# EAGLE board uart-usb (EAGLE 6.1)
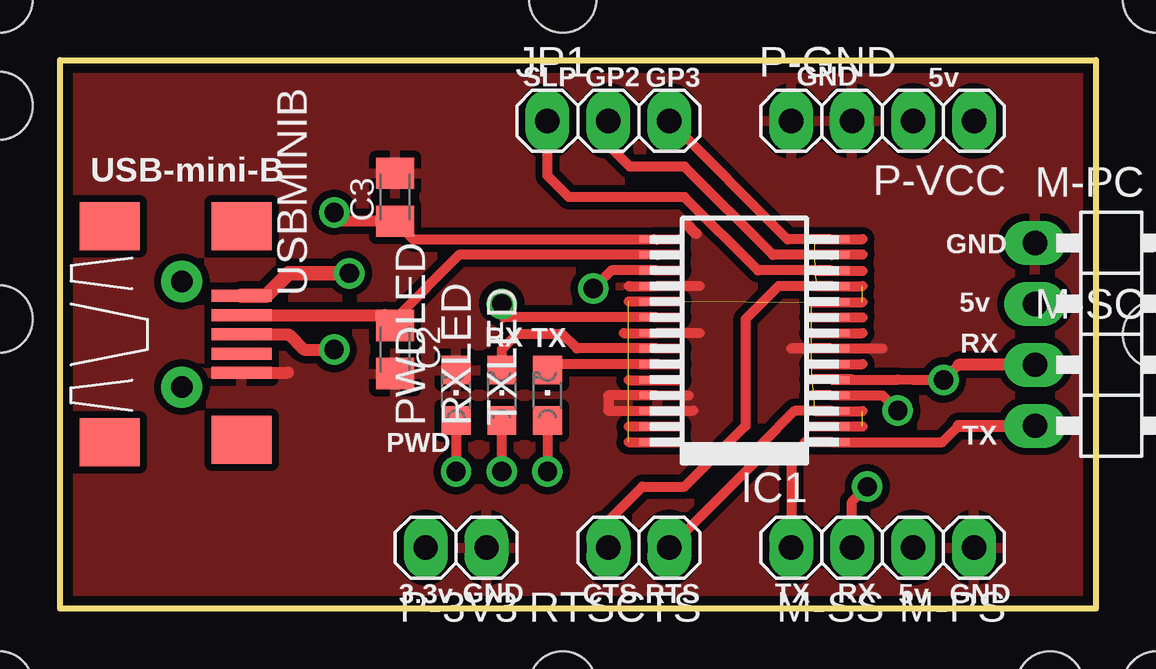
[diagram p0: board, top side]
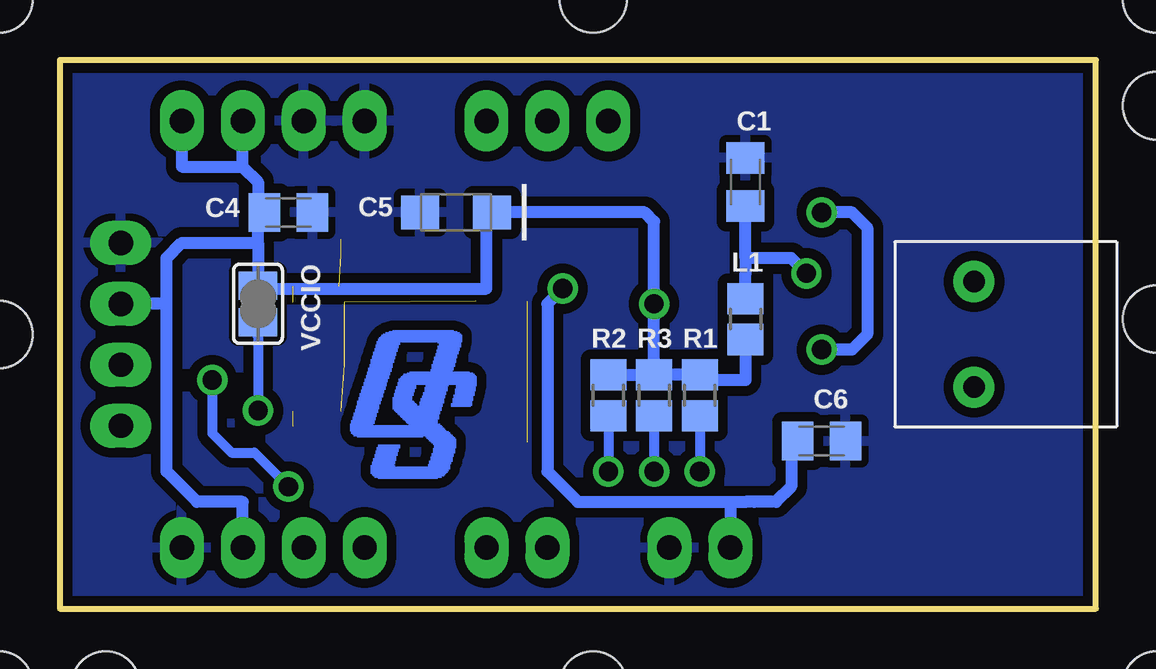
[diagram p1: board, bottom side, seen from below]

Size 43.18 x 22.86 mm. Coordinates in mm from the lower left corner, seen from the top.
Outline: 0,0 0,22.86 43.18,22.86 43.18,0 0,0
Copper layers (1*16): Top 0.035mm / dielectric 1.5mm / Bottom 0.035mm
Design rules: minimum track width 12mil, minimum drill 26mil, track to track 12mil, track to pad 12mil, pad to pad 12mil, via to via 12mil, smd to smd 8mil, copper to edge 16mil, drill to drill 16mil, minimum pad ring 16mil, minimum via ring 8mil, stop-mask expansion 4mil, vias tented up to drill 0mil, thermal gap 12mil
Net classes: 0 POWER: width 0.356 mm; 1 GPIO: width 0.356 mm; 2 NORMAL: width 0.356 mm
Holes 2.8 mm at -2.54,25.4 -2.54,-3.18 45.72,-3.18 45.72,25.4 20.96,25.4 20.96,-3.18 45.72,11.43 -2.54,12.06 -2.54,20.95 41.28,-3.18

## Footprints (pad centres in the part's own frame; a part is rotated, then mirrored left to right if it is on the bottom)
C0805K = smd 1.3 x 1.6: 1 -1,0; 2 1,0
SMC_A = smd 1.6 x 1.4: + -1.5,0; - 1.5,0
SSOP-28 = smd 0.3 x 1.5: 1 -4.225,-3.625; 2 -3.575,-3.625; 3 -2.925,-3.625; 4 -2.275,-3.625; 5 -1.625,-3.625; 6 -0.975,-3.625; 7 -0.325,-3.625; 8 0.325,-3.625; 9 0.975,-3.625; 10 1.625,-3.625; 11 2.275,-3.625; 12 2.925,-3.625; 13 3.575,-3.625; 14 4.225,-3.625; 15 4.225,3.625; 16 3.575,3.625; 17 2.925,3.625; 18 2.275,3.625; 19 1.625,3.625; 20 0.975,3.625; 21 0.325,3.625; 22 -0.325,3.625; 23 -0.975,3.625; 24 -1.625,3.625; 25 -2.275,3.625; 26 -2.925,3.625; 27 -3.575,3.625; 28 -4.225,3.625
1X03 = drill 1.016 long: 1 -2.54,0; 2 0,0; 3 2.54,0
R0805 = smd 1.3 x 1.5: 1 -0.85,0; 2 0.85,0
1X02/90 = drill 1.016 long: 1 -1.27,-3.81; 2 1.27,-3.81
1X02 = drill 1.016 long: 1 -1.27,0; 2 1.27,0
CHIPLED_0805 = smd 1.2 x 1.2: A 0,-1.05; C 0,1.05
USB-MB-S = smd 2.5 x 0.5: D+ 2.5,0; D- 2.5,0.8; GND 2.5,-1.6; ID 2.5,-0.8; VBUS 2.5,1.6 | smd 2.5 x 2: P$1 -3,-4.5; P$2 -3,4.5; P$3 2.5,-4.4; P$4 2.5,4.5 | drill 0.9: P$5 0,2.2; P$6 0,-2.2
SJ = smd 1.168 x 1.6: 1 -0.762,0; 2 0.762,0

## Placement (x,y rotation side)
C1  10nF**  [C0805K]  14.61,17.78 90 bottom
C2  47pF**  [C0805K]  13.97,10.8 270 top
C3  47pF**  [C0805K]  13.97,17.15 90 top
C4  100nF  [C0805K]  33.66,16.51 0 bottom
C5  4.7uF 20V  [SMC_A]  26.67,16.51 180 bottom
C6  100n  [C0805K]  11.43,6.98 0 bottom
DRILEGEND  [DRILEGEND]  -8.55,-4.79 0 top  (outside the outline)
IC1  FT232RL  [SSOP-28]  28.54,11.16 90 top
JP1  [1X03]  22.86,20.32 0 top
L1  0 H  [R0805]  14.61,12.06 270 bottom
M-PC  [1X02/90]  44.45,13.97 270 top
M-PS  [1X02]  36.83,2.54 180 top
M-SC  [1X02/90]  44.45,8.89 270 top
M-SS  [1X02]  31.75,2.54 180 top
P-3V3  [1X02]  16.51,2.54 180 top
P-GND  [1X02]  31.75,20.32 0 top
P-VCC  [1X02]  36.83,20.32 180 top
PWDLED  [CHIPLED_0805]  16.51,8.89 0 top
R1  270  [R0805]  16.51,8.89 270 bottom
R2  270  [R0805]  20.32,8.89 270 bottom
R3  510  [R0805]  18.42,8.89 270 bottom
RTSCTS  [1X02]  24.13,2.54 180 top
RXLED  [CHIPLED_0805]  18.42,8.89 0 top
TXLED  [CHIPLED_0805]  20.32,8.89 0 top
U$1  [SMP_OS12]  32.39,5.08 0 bottom
USBMINIB  [USB-MB-S]  5.08,11.43 0 top
VCCIO  [SJ]  34.92,12.7 270 bottom

## Library data of the parts
C1-C6 L1 R1-R3 = resistor
DRILEGEND = drilegend
IC1 = ftdi4
JP1 M-PC M-PS M-SC M-SS P-3V3 P-GND P-VCC RTSCTS = pinhead
PWDLED RXLED TXLED = led
U$1 = mlogo
USBMINIB = con-usb-3
VCCIO = jumper

## Nets
3V3OUT [GPIO]: C6.1 IC1.17 P-3V3.2
CTS [NORMAL]: IC1.11 RTSCTS.2
D+: C3.1 IC1.15 USBMINIB.D+
D-: C2.1 IC1.16 USBMINIB.D-
DCD [NORMAL]: IC1.10
DSR [NORMAL]: IC1.9
DTR [NORMAL]: IC1.2
GND: C1.2 C2.2 C3.2 C4.2 C5.- C6.2 IC1.7 IC1.18 IC1.21 IC1.25 IC1.26 M-PC.1 M-PS.1 P-3V3.1 P-GND.1 P-GND.2 PWDLED.C USBMINIB.GND
GPIO2 [GPIO]: IC1.13 JP1.2
GPIO3 [GPIO]: IC1.14 JP1.3
N$1: R3.2 RXLED.A
N$2: PWDLED.A R1.2
N$3: R2.2 TXLED.A
N$4: C1.1 L1.1 USBMINIB.VBUS
RI [NORMAL]: IC1.6
RTS [NORMAL]: IC1.3 RTSCTS.1
RXD [NORMAL]: IC1.5 M-SC.1 M-SS.1
RXLED [GPIO]: IC1.22 RXLED.C
SLEEP [GPIO]: IC1.12 JP1.1
TXD [NORMAL]: IC1.1 M-SC.2 M-SS.2
TXLED [GPIO]: IC1.23 TXLED.C
VCC: C4.1 C5.+ IC1.20 L1.2 M-PC.2 M-PS.2 P-VCC.1 P-VCC.2 R1.1 R2.1 R3.1 VCCIO.1
VCCIO: IC1.4 VCCIO.2

## Tracks (layer width: path | path; a pad name or v marks a point on that pad's centre or on a via)
3V3OUT  (via drill 0.8 pad 1.27)
  Top 0.406: IC1.17 22.98,14.09 v22.22,13.34
  Bottom 0.508: v22.22,13.34 22.86,12.7 22.86,5.72 21.59,4.45 15.24,4.45 | 15.24,4.45 14.61,4.45 14.23,4.45 13.33,4.45 12.7,5.08 12.7,6.72 C6.1 | 15.24,4.45 P-3V3.2
CTS
  Top 0.406: IC1.11 29.95,13.44 28.57,12.06 28.57,7.62 26.04,5.08 24.28,5.08 22.86,3.66 RTSCTS.2
D+  (via drill 0.8 pad 1.27)
  Top 0.406: IC1.15 24.89,15.37 14.75,15.37 C3.1
  Top 0.457: C3.1 11.79,16.15 v11.43,16.51
  Top 0.508: USBMINIB.D+ 9.52,11.43 10.16,10.8 v11.43,10.8
  Bottom 0.508: v11.43,10.8 10.16,10.8 9.52,11.43 9.52,15.88 10.16,16.51 v11.43,16.51
D-
  Top 0.406: IC1.16 16.64,14.74 13.97,12.06 13.7,11.8 C2.1
  Top 0.508: USBMINIB.D- 13.54,12.23 C2.1 13.97,12.06
GND
  Top 0.406: 26.67,13.44 IC1.18 | 26.67,11.48 24.91,11.48 | 34.29,10.85 30.48,10.85 30.48,10.84 IC1.7 | 26.39,8.26 22.86,8.26 22.86,8.89 IC1.25 26.21,8.89 | 23.7,13.44 IC1.18 | IC1.18 | 23.5,11.48 24.91,11.48 | 24.91,11.48 IC1.21
  Top 0.457: 26.06,16.1 26.52,15.62
  Top 0.508: 7.59,9.83 9.5,9.83
  pour Top (isolate 0.305): -0.02,22.88 43.21,22.88 43.18,1.91 43.18,-0.02 -0.02,-0.02
  pour Bottom (isolate 0.406): -0.02,22.88 43.18,22.86 43.18,-0.02 -0.02,-0.02
GPIO2
  Top 0.406: IC1.13 29.71,14.74 26.04,18.41 23.76,18.41 22.86,19.31 JP1.2
GPIO3
  Top 0.406: IC1.14 30.33,15.39 JP1.3
N$1  (via drill 0.8 pad 1.27)
  Top 0.406: RXLED.A v18.42,5.72
  Bottom 0.406: R3.2 v18.42,5.72
N$2  (via drill 0.8 pad 1.27)
  Top 0.406: PWDLED.A v16.51,5.72
  Bottom 0.406: R1.2 v16.51,5.72
N$3  (via drill 0.8 pad 1.27)
  Top 0.406: TXLED.A v20.32,5.72
  Bottom 0.406: R2.2 v20.32,5.72
N$4  (via drill 0.8 pad 1.27)
  Top 0.61: USBMINIB.VBUS 8.59,13.03 9.52,13.97 v12.06,13.97
  Bottom 0.508: 14.61,14.6 C1.1 | L1.1 14.61,13.97 14.61,14.6 | v12.06,13.97 12.7,14.6 14.61,14.6
N$5  (13 unrouted)
  Top 0.406: 31.47,15.39 33.45,15.39 | 31.47,14.76 33.45,14.76 | 31.5,14.07 33.45,14.07 | 31.32,12.14 33.45,12.14 | 31.55,13.44 33.45,13.44 | 31.32,12.78 33.45,12.78 | 31.32,11.48 33.45,11.48 | 31.32,10.19 33.45,10.19 | 31.47,8.23 33.45,8.23 | 31.32,7.59 33.45,7.59 | 23.7,7.59 25.83,7.59 | 23.7,6.93 25.83,6.93 | 23.7,9.52 25.83,9.52 | 23.7,12.8 25.83,12.8
N$6
  Top 0.406: 24.76,15.39 25.81,15.39
N$7
  Top 0.406: 24.76,14.76 25.83,14.76
N$8
  Top 0.406: 24.76,14.1 25.83,14.1
N$9
  Top 0.406: 24.76,12.14 25.83,12.14
N$10
  Top 0.406: 24.76,10.85 25.83,10.85
N$11
  Top 0.406: 24.13,10.19 25.83,10.19
N$12
  Top 0.406: 33.02,9.55 31.32,9.55
RTS
  Top 0.406: IC1.3 30.62,8.24 29.21,6.83 29.21,6.35 RTSCTS.1
RXD  (via drill 0.8 pad 1.27)
  Top 0.406: IC1.5 34.92,9.54 35.56,9.52 v36.83,9.52 37.47,10.16 | v33.66,5.08 33.02,4.45 M-SS.1
  Top 0.508: M-SC.1 37.47,10.16
  Bottom 0.406: v36.83,9.52 36.83,7.3 36.03,6.5 35.08,6.5 v33.66,5.08
RXLED
  Top 0.406: IC1.22 21.54,10.84 20.96,11.43 19.05,11.43 18.42,10.8 RXLED.C
SLEEP
  Top 0.406: IC1.12 29.09,14.09 26.04,17.15 21.22,17.15 20.32,18.04 JP1.1
TXD
  Top 0.406: M-SS.2 30.48,6.35 31.07,6.94 IC1.1 36.78,6.94 37.47,7.62
  Top 0.508: 37.47,7.62 M-SC.2
TXLED
  Top 0.406: 20.57,10.19 TXLED.C 20.32,10.16 20.35,10.19 IC1.23
VCC  (via drill 0.8 pad 1.27)
  Top 0.406: IC1.20 18.49,12.14 v18.42,12.7
  Bottom 0.406: R3.1 18.42,9.52
  Bottom 0.508: 38.73,12.7 38.73,14.6 38.1,15.24 34.92,15.24 | M-PS.2 35.56,4.45 37.47,4.45 38.73,5.72 38.73,12.7 | 38.73,12.7 M-PC.2 | 35.56,18.41 P-VCC.2 | P-VCC.1 38.1,18.41 35.56,18.41 | VCCIO.1 34.8,13.46 | 34.92,15.24 VCCIO.1 | VCCIO.1 34.92,13.34 25.4,13.34 25.4,16.28 C5.+ 18.8,16.51 18.42,16.12 v18.42,12.7 18.42,10.16 18.42,9.52 | 16.09,10.16 R1.1 | R1.1 R3.1 R2.1 | 35.56,18.41 34.92,17.78 34.92,16.24 | 34.92,15.24 34.92,16.24 | 34.92,16.24 C4.1 | L1.2 14.61,9.52 16.29,9.52 R1.1
VCCIO  (via drill 0.8 pad 1.27)
  Top 0.406: v34.92,8.26 34.29,8.89 IC1.4 31.32,8.89
  Bottom 0.406: VCCIO.2 v34.92,8.26
  Bottom 0.508: VCCIO.2 34.92,11.43

## Text on the board
tSilk: SLP | GP2 | GP3 | GND | 5v | USB-mini-B | GND | 5v | RX | TX | RX | PWD | TX | 3.3v | GND | CTS | RTS | TX | RX | 5v | GND
bSilk: |